# EAGLE board stm32f3driver3 (EAGLE 6.6.0)
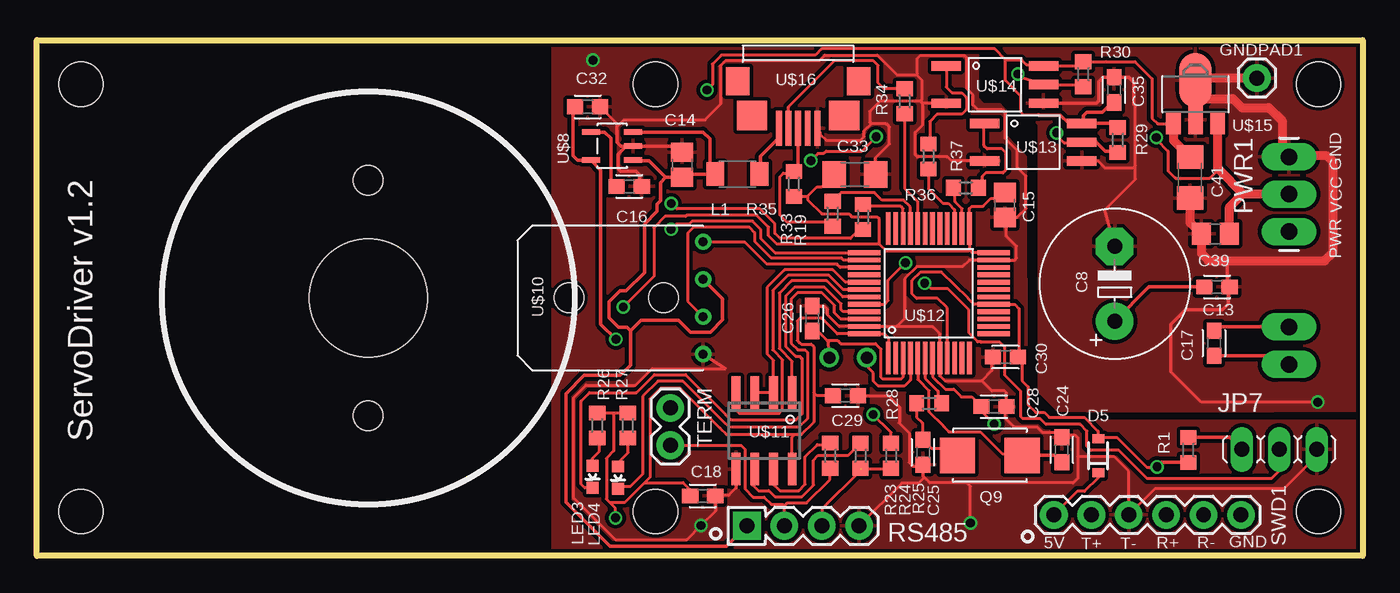
[diagram p0: board, top side]
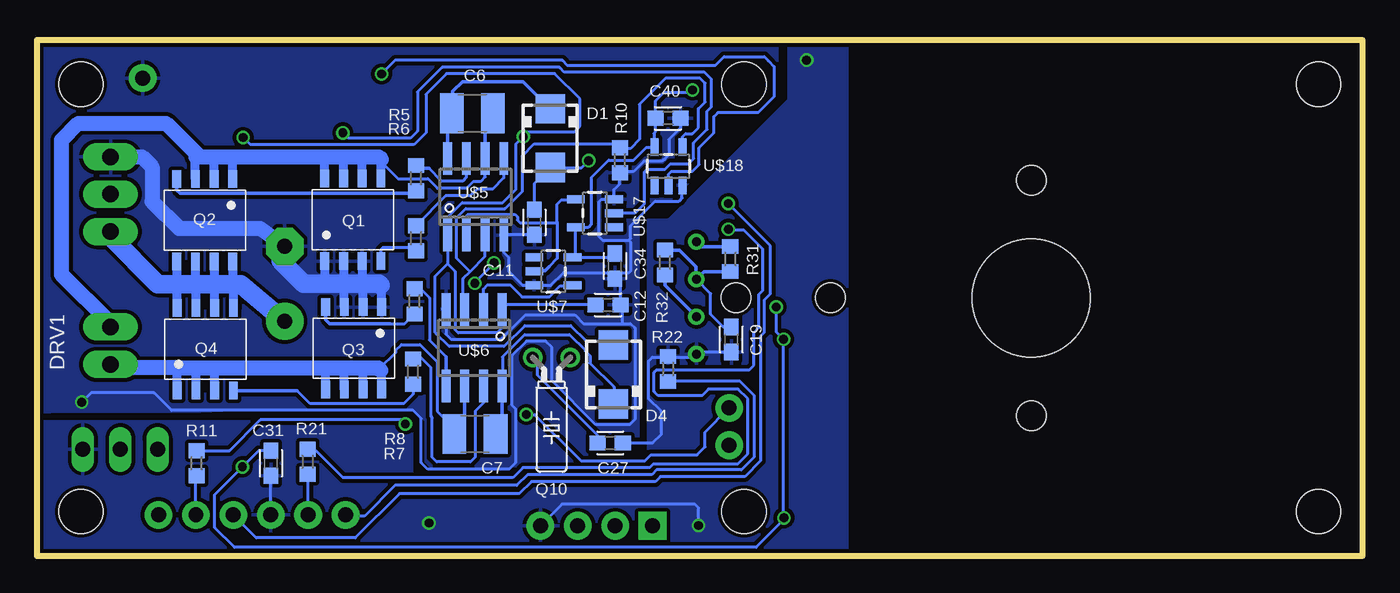
[diagram p1: board, bottom side, seen from below]

Size 90 x 35 mm. Coordinates in mm from the lower left corner, seen from the top.
Outline: 0,0 0,35 90,35 90,0 0,0
Copper layers (1*16): Top 0.035mm / dielectric 1.5mm / Bottom 0.035mm
Design rules "Elecrow_2-layer_eagle_rule": minimum track width 6mil, minimum drill 12mil, track to track 6mil, track to pad 6mil, pad to pad 6mil, via to via 6mil, smd to smd 0mil, copper to edge 10mil, drill to drill 10mil, minimum pad ring 10mil, minimum via ring 6mil, stop-mask expansion 2mil, vias tented up to drill 100mil, thermal gap 10mil
Holes 3 mm at 3,3 87,3 87,32 3,32 42,32 42,3
Holes 8 mm at 22.5,17.5
Holes 2 mm at 22.5,25.5 22.5,9.5

## Footprints (pad centres in the part's own frame; a part is rotated, then mirrored left to right if it is on the bottom)
C3225 = smd 1.6 x 2.7: 1 -1.4,0; 2 1.4,0
E5-10,5 = drill 1.016 pad 2.54: + -2.54,0 | drill 1.016 pad 2.54 octagon: - 2.54,0
C0603 = smd 1.1 x 1: 1 -0.85,0; 2 0.85,0
C2012 = smd 1.3 x 1.5: 1 -0.85,0; 2 0.85,0
C1608 = smd 1.1 x 1: 1 -0.85,0; 2 0.85,0
C3216 = smd 1.6 x 1.8: 1 -1.4,0; 2 1.4,0
C0805 = smd 1.3 x 1.5: 1 -0.95,0; 2 0.95,0
SMA = smd 2 x 2: A 2,0; C -2,0
SOD-323 = smd 0.63 x 0.83: 1 -1.15,0; 2 1.15,0
1X01 = drill 1.016 pad 1.88: 1 0,0
1X02_LONGPADS = drill 1.118 pad 1.88 long: 1 0,0; 2 2.54,0
1X03 = drill 1.016 long: 1 -2.54,0; 2 0,0; 3 2.54,0
L3216C = smd 1.2 x 1.6: 1 -1.5,0; 2 1.5,0
LED-0603 = smd 0.8 x 0.8: A 0,-0.75; C 0,0.75
1X03_LONGPADS = drill 1.118 pad 1.88 long: 1 0,0; 2 2.54,0; 3 5.08,0
1206-8CHIP-FET = smd 0.6 x 1.2: 1 -1.905,-2.8; 2 -0.635,-2.8; 3 0.635,-2.8; 4 1.905,-2.8; 5 1.905,2.8; 6 0.635,2.8; 7 -0.635,2.8; 8 -1.905,2.8
SMD5032 = smd 2.4 x 2.4: P1 2.2,0; P2 -2.2,0
TC26H = drill 0.813: 1 -1.27,0; 2 1.27,0
R0603 = smd 1 x 1.1: 1 -0.85,0; 2 0.85,0
1X04 = drill 1.016 pad 1.88 square: 1 0,0 | drill 1.016 pad 1.88: 2 2.54,0; 3 5.08,0; 4 7.62,0
1X06 = drill 1.016 pad 1.88: 1 0,0; 2 2.54,0; 3 5.08,0; 4 7.62,0; 5 10.16,0; 6 12.7,0
1X02 = drill 1.016 pad 1.88: 1 0,0; 2 2.54,0
SO8 = smd 0.6 x 2.2: 1 -1.905,-2.6; 2 -0.635,-2.6; 3 0.635,-2.6; 4 1.905,-2.6; 5 1.905,2.6; 6 0.635,2.6; 7 -0.635,2.6; 8 -1.905,2.6
SOT23-5 = smd 0.55 x 1.2: 1 -0.95,-1.3; 2 0,-1.3; 3 0.95,-1.3; 4 0.95,1.3; 5 -0.95,1.3
TAR5SB33 = smd 1.2 x 0.4: P$_1 -1.425,0.95; P$_2 -1.425,0; P$_3 -1.425,-0.95; P$_4 1.425,-0.95; P$_5 1.425,0.95
HEDS9701 = drill 0.6: P$1 9.1,3.81; P$2 9.1,1.27; P$3 9.1,-1.27; P$4 9.1,-3.81 | hole 2: 0,0; 6.4,0
TQFP48 = smd 0.32 x 2.2: P$1 -2.75,-4.4; P$2 -2.25,-4.4; P$3 -1.75,-4.4; P$4 -1.25,-4.4; P$5 -0.75,-4.4; P$6 -0.25,-4.4; P$7 0.25,-4.4; P$8 0.75,-4.4; P$9 1.25,-4.4; P$10 1.75,-4.4; P$11 2.25,-4.4; P$12 2.75,-4.4; P$25 2.75,4.4; P$26 2.25,4.4; P$27 1.75,4.4; P$28 1.25,4.4; P$29 0.75,4.4; P$30 0.25,4.4; P$31 -0.25,4.4; P$32 -0.75,4.4; P$33 -1.25,4.4; P$34 -1.75,4.4; P$35 -2.25,4.4; P$36 -2.75,4.4 | smd 2.2 x 0.32: P$13 4.4,-2.75; P$14 4.4,-2.25; P$15 4.4,-1.75; P$16 4.4,-1.25; P$17 4.4,-0.75; P$18 4.4,-0.25; P$19 4.4,0.25; P$20 4.4,0.75; P$21 4.4,1.25; P$22 4.4,1.75; P$23 4.4,2.25; P$24 4.4,2.75; P$37 -4.4,2.75; P$38 -4.4,2.25; P$39 -4.4,1.75; P$40 -4.4,1.25; P$41 -4.4,0.75; P$42 -4.4,0.25; P$43 -4.4,-0.25; P$44 -4.4,-0.75; P$45 -4.4,-1.25; P$46 -4.4,-1.75; P$47 -4.4,-2.25; P$48 -4.4,-2.75
SO5 = smd 0.635 x 2: P$1 -1.27,-3.3; P$2 1.27,-3.3; P$3 1.27,3.3; P$4 0,3.3; P$5 -1.27,3.3
SOT89 = smd 1 x 1.5: 1 -1.499,-1.981; 3 1.499,-1.981 | smd 1 x 2: 2 0,-1.727 | smd 2.2 x 3.7: 2@1 0,0.94
USB_MICROB = smd 0.4 x 2.4: P$1 1.3,3.2; P$2 0.65,3.2; P$3 0,3.2; P$4 -0.65,3.2; P$5 -1.3,3.2 | smd 2.05 x 2: P$6 -3.125,2.35; P$7 3.125,2.35 | smd 1.6 x 1.9: P$8 -4.1,0; P$9 4.1,0

## Placement (x,y rotation side)
C6  22uF  [C3225]  60.44,30.04 0 bottom
C7  22uF  [C3225]  60.26,8.27 180 bottom
C8  470uF  [E5-10,5]  73.17,18.46 90 top
C11  0.1uF  [C0603]  56.23,22.63 270 bottom
C12  0.1uF  [C0603]  51.22,17.03 0 bottom
C13  0.1uF  [C0603]  80.11,18.25 0 top
C14  1uF  [C2012]  43.8,26.53 90 top
C15  4.7uF  [C2012]  65.71,23.81 270 top
C16  0.01uF  [C0603]  40.21,25.07 0 top
C17  0.1uF  [C0603]  79.91,14.43 270 top
C18  0.1uF  [C1608]  45.2,4.07 0 top
C19  0.1uF  [C0603]  42.86,14.68 90 bottom
C24  7pF  [C0603]  69.58,7.2 90 top
C25  7pF  [C0603]  60.15,7.03 270 top
C26  6.8pF  [C0603]  52.63,16.11 90 top
C27  6.8pF  [C0603]  51.08,7.66 0 bottom
C28  0.1uF  [C0603]  64.97,10.13 0 top
C29  0.01uF  [C0603]  54.89,10.87 0 top
C30  0.01uF  [C0603]  65.75,13.49 180 top
C31  0.01uF  [C0603]  74.11,6.28 270 bottom
C32  0.01uF  [C0603]  37.39,30.47 0 top
C33  10uF  [C3216]  55.53,25.88 0 top
C34  0.1uF  [C0603]  50.76,19.66 270 bottom
C35  0.1uF  [C0603]  73.12,31.62 90 top
C39  0.33uF  [C0805]  80,21.85 180 top
C40  0.1uF  [C0603]  47.15,29.69 0 bottom
C41  10uF  [C3216]  78.27,25.67 270 top
D1  SX34F  [SMA]  55.16,28.34 270 bottom
D4  SX34F  [SMA]  50.86,12.3 90 bottom
D5  1SS352  [SOD-323]  72.05,6.79 90 top
GNDPAD1  M01PTH  [1X01]  82.82,32.42 0 top
JP1  [1X02_LONGPADS]  85,13 90 top
JP7  [1X03]  84.34,7.23 180 top
L1  [L3216C]  47.56,25.91 180 top
LED3  [LED-0603]  37.73,5.37 180 top
LED4  [LED-0603]  39.46,5.31 180 top
PWR1  [1X03_LONGPADS]  85,22 90 top
Q1  FDS5680  [1206-8CHIP-FET]  68.55,22.8 0 bottom
Q2  FDS5680  [1206-8CHIP-FET]  78.6,22.77 180 bottom
Q3  FDS5680  [1206-8CHIP-FET]  68.49,14.08 180 bottom
Q4  FDS5680  [1206-8CHIP-FET]  78.56,14.02 0 bottom
Q9  8MHz  [SMD5032]  64.69,6.82 180 top
Q10  32.768kHz  [TC26H]  55.07,13.45 180 bottom
R1  10k  [R0603]  78.16,7.19 270 top
R5  22  [R0603]  64.26,25.63 90 bottom
R6  22  [R0603]  64.26,21.55 90 bottom
R7  22  [R0603]  64.46,12.5 90 bottom
R8  22  [R0603]  64.36,17.27 90 bottom
R10  10k  [R0603]  50.42,26.85 270 bottom
R11  22  [R0603]  79.15,6.29 90 bottom
R19  22  [R0603]  56.08,22.99 90 top
R21  22  [R0603]  71.61,6.38 90 bottom
R22  10k  [R0603]  47.15,12.68 270 bottom
R23  33  [R0603]  53.86,6.8 270 top
R24  33  [R0603]  55.91,6.79 270 top
R25  100  [R0603]  57.98,6.79 90 top
R26  330  [R0603]  38.04,8.85 90 top
R27  330  [R0603]  40.12,8.85 90 top
R28  220  [R0603]  60.57,10.35 180 top
R29  330  [R0603]  73.37,28.22 90 top
R30  330  [R0603]  71.03,32.68 90 top
R31  330  [R0603]  42.93,20.14 270 bottom
R32  330  [R0603]  47.36,19.9 90 bottom
R33  27  [R0603]  54.02,23.22 270 top
R34  27  [R0603]  58.91,30.85 90 top
R35  1.5k  [R0603]  51.39,25.24 270 top
R36  470  [R0603]  63.07,24.97 180 top
R37  470  [R0603]  60.53,27.1 270 top
RS485  [1X04]  48.2,2.04 0 top
SWD1  [1X06]  69.04,2.78 0 top
TERM  [1X02]  43,10.04 270 top
U$5  IR2302S  [SO8]  60.21,24.36 0 bottom
U$6  IR2302S  [SO8]  60.32,14.12 180 bottom
U$7  4S69F  [SOT23-5]  54.94,19.3 270 bottom
U$8  TAR5SB33  [TAR5SB33]  39.05,27.81 180 top
U$10  HEDS9701-C54  [HEDS9701]  36.13,17.5 0 top
U$11  SN65HVD3085  [SO8]  49.37,8.49 180 top
U$12  STM32F373C  [TQFP48]  60.55,17.82 0 top
U$13  ACPL-M60L  [SO5]  67.63,28.07 270 top
U$14  ACPL-M60L  [SO5]  65.04,31.98 270 top
U$15  NJM78L05UA  [SOT89]  78.65,31.33 0 top
U$16  USB-MICROB  [USB_MICROB]  51.68,32.22 180 top
U$17  4S69F  [SOT23-5]  52.12,23.26 90 bottom
U$18  4S69F  [SOT23-5]  47.13,26.44 0 bottom

## Library data of the parts
C6-C8 C11-C19 C24-C35 C39-C41 L1 R1 R5-R8 R10 R11 R19 R21-R37 = rcl
D1 D4 = diode
D5 GNDPAD1 JP1 LED3 LED4 PWR1 RS485 SWD1 TERM = SparkFun
JP7 Q1-Q4 Q9 U$5-U$8 U$10-U$18 = mizdevice
Q10 = crystal; OC_FARNELL: unknown; OC_NEWARK: unknown

## Nets
+3V3: C15.1 C18.1 C29.1 C30.1 C31.1 C32.1 C33.1 D5.2 R1.2 R26.2 R27.2 R35.2 U$8.P$_5 U$11.8 U$12.P$1 U$12.P$9 U$12.P$17 U$12.P$24 U$12.P$25 U$12.P$48
+5V: C14.1 C19.2 L1.2 R31.2 R32.2 RS485.1 U$8.P$_1 U$8.P$_3 U$10.P$2
BOOT0: JP7.2 U$12.P$44
DGND: C14.2 C15.2 C16.2 C18.2 C19.1 C24.2 C25.2 C26.2 C27.2 C28.2 C29.2 C30.2 C31.2 C32.2 C33.2 JP7.1 R22.1 RS485.4 SWD1.3 U$8.P$_2 U$10.P$4 U$11.5 U$12.P$8 U$12.P$23 U$12.P$47 U$13.P$2 U$14.P$2 U$16.P$5
DRV_IN: U$5.2 U$7.2 U$17.4
GND: C8.- C11.2 C12.2 C13.2 C34.2 C35.2 C39.2 C40.2 C41.2 GNDPAD1.1 PWR1.3 Q1.1 Q1.2 Q1.3 Q3.1 Q3.2 Q3.3 R10.2 U$5.4 U$6.4 U$7.3 U$13.P$3 U$14.P$3 U$15.2 U$15.2@1 U$17.3 U$18.3
JRST: C28.1 R11.2 U$12.P$7
JTCK: R21.2 U$12.P$37
JTMS: R19.2 U$12.P$34
LED0: LED3.C U$12.P$45
LED1: LED4.C U$12.P$46
N$1: C7.1 D4.C U$6.8
N$3: C7.2 C17.2 JP1.1 Q3.5 Q3.6 Q3.7 Q3.8 Q4.1 Q4.2 Q4.3 U$6.6
N$5: C6.2 C17.1 JP1.2 Q1.5 Q1.6 Q1.7 Q1.8 Q2.1 Q2.2 Q2.3 U$5.6
N$6: C6.1 D1.C U$5.8
N$7: R5.2 U$5.7
N$10: R6.2 U$5.5
N$11: R7.2 U$6.7
N$13: R8.2 U$6.5
N$14: Q2.4 R5.1
N$15: Q4.4 R7.1
N$16: Q3.4 R8.1
N$17: U$6.2 U$7.4
N$18: Q1.4 R6.1
N$19: D5.1 R22.2 SWD1.1
N$20: R21.1 SWD1.2
N$22: R19.1 SWD1.4
N$28: R11.1 SWD1.5
N$30: C16.1 U$8.P$_4
N$34: LED3.A R26.1
N$37: LED4.A R27.1
N$38: R23.1 U$11.7
N$42: R24.1 U$11.6
N$45: R24.2 R25.1 RS485.3
N$48: R23.2 RS485.2 TERM.2
N$49: R25.2 TERM.1
N$50: R28.1 U$12.P$6
N$51: C25.1 Q9.P1 R28.2
N$52: C24.1 Q9.P2 U$12.P$5
N$53: C27.1 Q10.2 U$12.P$4
N$54: C26.1 Q10.1 U$12.P$3
N$55: R34.2 U$16.P$2
N$56: R33.2 R35.1 U$16.P$3
N$57: L1.1 U$16.P$1
N$58: R29.1 U$13.P$4 U$17.2
N$59: R30.1 U$14.P$4 U$18.2
N$60: R37.1 U$14.P$1
N$61: R36.1 U$13.P$1
N$66: JP7.3 R1.1
SD1: R37.2 U$12.P$27
SD_IN: R10.1 U$5.3 U$6.3 U$18.4
TIM2_CH1: R32.1 U$10.P$3 U$12.P$38
TIM2_CH2: R31.1 U$10.P$1 U$12.P$39
TIM12_CH1: R36.2 U$12.P$26
U1ENA: U$11.2 U$11.3 U$12.P$41
U1RX: U$11.1 U$12.P$43
U1TX: U$11.4 U$12.P$42
USBDM: R34.1 U$12.P$32
USBDP: R33.1 U$12.P$33
VCC: C11.1 C12.1 C39.1 D1.A D4.A PWR1.2 U$5.1 U$6.1 U$15.3
VCC/2: C34.1 C35.1 C40.1 C41.1 R29.2 R30.2 U$7.5 U$13.P$5 U$14.P$5 U$15.1 U$17.5 U$18.5
VDD: C8.+ C13.1 PWR1.1 Q2.5 Q2.6 Q2.7 Q2.8 Q4.5 Q4.6 Q4.7 Q4.8

## Tracks (layer width: path | path; a pad name or v marks a point on that pad's centre or on a via)
+3V3  (via drill 0.6)
  Top 0.2: 52.74,11.08 52.74,14.18 52.56,14.36 51.9,14.36 51.82,14.44 51.81,14.44 51.63,14.62 51.63,15.95 51.8,16.12 53.29,16.12 54.34,15.07 U$12.P$48 57.53,15.07 57.8,14.8 U$12.P$1 | 52.74,11.08 52.74,9.07 51.91,8.24 51.46,8.24 | U$12.P$9 61.8,16.82 61.14,17.48 59.71,17.48 59.41,17.78 59.41,18.69 59.98,19.26 61.41,19.26 63.22,17.47 63.22,17.46 63.61,17.07 U$12.P$17 66.38,17.07 66.68,16.77 66.68,13.57 C30.1 66.88,13.21 66.88,11.89 67.28,11.49 67.28,10.27 67.81,9.74 68.38,9.74 68.72,9.4 71.11,9.4 72.04,8.47 D5.2 | 63.3,20.75 63.46,20.59 64.93,20.59 U$12.P$24 | C15.1 65.31,24.26 64.77,24.26 64.23,23.72 63.46,23.72 63.3,23.56 U$12.P$25 63.3,20.75 | C29.1 52.95,10.87 52.74,11.08 | D5.2 | 52.32,24.39 R35.2 51.77,24.39 | 52.32,24.39 52.97,25.04 53.29,25.04 C33.1 | 57.19,21.16 57.66,20.69 63.24,20.69 63.3,20.75 | D5.2 72.15,8.04 73.33,8.04 75.36,6.01 76.01,6.01 v76.04,6.04 | R27.2 40.09,9.67 39.16,9.67 | R27.2 39.78,9.7 | 39.16,9.67 39.16,7.12 38.66,6.62 38.66,3.85 38.87,3.64 | 38.87,3.64 39.93,3.64 41.26,4.97 | 41.26,4.97 43.88,4.97 44.35,4.5 C18.1 | 39.16,9.67 38.29,9.67 R26.2 | U$8.P$_5 37.62,26.84 | v39.28,2.58 39.28,3.23 38.87,3.64 | 57.19,21.16 57.19,22.86 57.06,22.99 55.38,22.99 55.16,23.21 53.28,23.21 52.32,24.17 52.32,24.39 | 40.18,9.76 R27.2 | 41.26,4.97 41.62,5.33 41.62,10.65 42.35,11.38 43.66,11.38 46.37,8.67 46.37,8.66 46.39,8.66 46.81,8.24 51.46,8.24 | U$11.8 51.27,8.05 51.46,8.24 | 57.19,21.16 50.23,21.16 49.68,21.71 49.68,22.3 48.86,23.12 44.13,23.12 44.05,23.04 42.64,23.04 41.88,22.28 41.88,18.96 v39.81,16.89
  Top 0.254: U$8.P$_5 36.71,26.86 36.41,27.16 36.41,30.34 C32.1 | 37.62,26.84 38.28,26.18 38.28,15.73 v39.31,14.7 | R1.2 76.34,6.34 v76.04,6.04
  Bottom 0.2: C31.1 74.95,7.13 v76.04,6.04 77.92,4.16 77.92,1.92 76.58,0.58 41.18,0.58 39.28,2.48 v39.28,2.58 39.31,2.61 v39.31,14.7 39.81,15.2 v39.81,16.89
+5V
  Top 0.2: 37.16,12.24 37.15,12.25
  Top 0.254: 42.69,25.68 C14.1 44.03,25.91 L1.2 45.69,26.28 45.69,28.29 45.22,28.76 U$8.P$_3 | 42.69,25.68 41.57,26.8 40.53,26.8 U$8.P$_1 | 42.69,25.68 42.34,25.33 42.34,24.1 42.11,23.87 42.11,23.37 41.24,22.5 41.24,19.22 40,17.98 39.6,17.98 38.85,17.23 38.85,16.15 39.48,15.52 40.06,15.52 40.3,15.28 | RS485.1 46.8,0.64 38.92,0.64 35.91,3.65 35.91,11.01 37.15,12.25 | 37.16,12.24 39.6,12.24 40.3,12.94 40.3,15.28 | 40.3,15.28 41,15.98 43.56,15.98 44.36,15.18 45.72,15.18 46.55,16.01 46.55,17.45 U$10.P$2
  Bottom 0.2: C19.2 43.41,15.53 44.26,16.38 44.26,17.8 U$10.P$2
  Bottom 0.254: R32.2 46.37,20.75 45.24,19.62 U$10.P$2 44.71,19.29 R31.2
BOOT0  (via drill 0.6)
  Top 0.2: JP7.2 84.34,5.77 83.81,5.24 75.38,5.24 73.46,7.16 71.56,7.16 71.29,7.43 71.29,8.47 70.83,8.93 68.5,8.93 68.12,9.31 66.92,9.31 66.79,9.44 66.79,11.18 65.71,12.26 65.71,14.16 65.38,14.49 64.11,14.49 64.08,14.52 63.88,14.52 63.26,15.14 63.26,16.7 61.83,18.13 60.7,18.13 v60.27,18.5 | U$12.P$44 57.52,17.07 57.79,17.34 57.79,18.7 v58.97,19.88
  Bottom 0.2: 59.1,19.71 v58.97,19.88 v60.27,18.5
DGND  (via drill 0.6)
  Top 0.2: 60.14,30.72 60.14,29.27 59.63,28.76 59.63,27.21 59.76,27.08 61.81,27.08 62.09,26.8 U$13.P$2 64.57,26.8 | 60.14,30.72 60.14,30.76 60.04,30.76 59.96,30.84 | 60.18,5.39 60.18,6.15 C25.2 60.05,6.08 59.48,6.08 59.22,6.34 59.22,8.32 58.54,9 58.54,10.13 57.8,10.87 C29.2 | C26.2 52.69,16.9 53.49,16.9 53.67,16.72 53.67,16.35 54.45,15.57 U$12.P$47 58.4,15.57 | 39.4,28.85 39.4,29.12 | 39.4,29.12 39.87,29.59 45.36,29.59 46.4,30.63 46.4,33.25 46.75,33.6 53.12,33.6 53.49,33.97 57.06,33.97 58.37,32.66 59.71,32.66 | 39.4,29.12 39.4,29.31 C32.2 | 52.98,28.74 53.16,28.74 53.16,28.62 53.59,28.19 55.9,28.19 56.15,28.44 56.15,28.83 56.64,29.32 | U$11.5 47.47,4.62 46.96,4.11 46.09,4.11 C18.2 46.06,3.04 v45.08,2.06 44.12,1.1 39.27,1.1 36.45,3.92 36.42,3.92 36.42,10.72 37.28,11.58 40.64,11.58 41.76,12.7 46.74,12.7 U$10.P$4 | 56.64,29.32 57.66,29.32 57.88,29.1 57.88,27.95 56.93,27 C33.2 | U$14.P$2 60.15,30.71 60.14,30.72 | 59.71,32.66 60.08,32.29 60.08,30.96 59.96,30.84 | 59.71,32.66 59.75,32.7 59.75,33.74 59.96,33.95 62.97,33.95 63.13,33.79 63.13,31.7 63.54,31.29 63.54,30.61 63.89,30.26 65.54,30.26 65.76,30.04 65.76,28.29 66.57,27.48 66.57,26.34 67.14,25.77 67.14,23.56 66.54,22.96 C15.2 65.82,22.85 65.82,21.7 66.51,21.01 66.51,20.22 66.36,20.07 U$12.P$23 63.29,20.07 62.84,19.62 59.74,19.62 58.91,18.79 58.91,16.08 58.4,15.57 | 59.96,30.84 57.22,30.84 56.54,30.16 56.54,29.42 56.64,29.32 | 60.18,5.39 60.18,5.26 59.86,4.94 58.72,4.94 RS485.4 | 63.15,4.95 70.36,4.95 70.66,5.25 70.66,6.75 | 63.15,4.95 60.62,4.95 60.18,5.39 | 64.14,11.89 61.63,11.89 61.3,12.22 U$12.P$8 61.3,15.08 60.81,15.57 58.4,15.57
  Top 0.2: 64.14,11.89 64.84,12.59 64.84,13.43 C30.2 | 64.14,11.89 64.83,11.2 65.68,11.2 65.82,11.06 C28.2 65.76,10.07 65.76,9.33 66.23,8.86 66.24,8.86 66.34,8.76 67.89,8.76 68.27,8.38 69.25,8.38 C24.2 | 86.88,6.8 86.88,6.79 84.63,4.54 75.88,4.54 SWD1.3 74.12,5.74 73.13,6.73 70.68,6.73 70.66,6.75 | v63.38,2.23 63.38,4.72 63.15,4.95 | 69.74,8.21 70.45,8.21 70.66,8 70.66,6.75
  Top 0.254: 69.74,8.21 C24.2 | U$16.P$5 52.98,28.74 | C14.2 43.37,27.81 U$8.P$_2 40.01,27.8 | 39.4,28.85 39.4,28.07 39.67,27.8 40.01,27.8 | 40.01,27.8 39.45,27.24 39.45,26.27 39.63,26.09 40.67,26.09 40.91,25.85 40.91,25.22 C16.2 | JP7.1 86.88,6.8
  Bottom 0.2: SWD1.3 C31.2 | v45.08,2.06 45.08,3.26 45.33,3.51 54.35,3.51 RS485.4 | C27.2 48.19,7.66 47.61,8.24 47.61,9.8 48.48,10.67 48.48,13.21 48.21,13.48 47.2,13.48 | 47.2,13.48 R22.1 | 47.2,13.48 45.44,13.48 U$10.P$4 45.09,13.83 C19.1
  other vias: 37.75,33.64
  pour Top (isolate 0.254): 35.33,34.67 35,34.62 35,0.37 89.67,0.37 89.72,9.13 82.29,9.12 68.69,9.12 67.16,10.62 67.13,27.08 65.79,28.52 65.77,30.22 65.39,30.62 64.27,30.63 63.88,31.04 63.88,34.62 63.82,34.68 35.93,34.65 35.69,34.67
  pour Bottom (isolate 0.254): 89.72,0.32 89.73,0.4 89.64,9.14 77.33,9.12 74.76,9.18 65.21,9.2 64.56,8.55 64.56,5.79 63.98,5.21 48.48,5.21 48.48,22.81 47.13,22.81 38.95,30.99 38.95,34.69 35,34.69 35,0.31 89.4,0.31 89.4,0.34
DRV_IN
  Bottom 0.2: 54.67,22.65 54.67,20.18 55.22,19.63 | 54.67,22.65 54.72,22.6 57.19,22.6 57.38,22.79 57.38,23 57.55,23.17 60.73,23.17 60.84,23.05 U$5.2 | 54.67,22.65 54.67,23.87 54.39,24.15 53.48,24.15 U$17.4
  Bottom 0.254: 55.22,19.63 55.49,19.36 56.18,19.36 U$7.2
GND  (via drill 0.6)
  Top 0.2: C8.- 72.5,23.49 74.57,25.56 74.57,26.49 | 74.57,26.49 74.57,30.54 74.47,30.64 | U$13.P$3 72.04,26.8 72.49,26.35 74.43,26.35 74.57,26.49 | v86.95,10.43 79.06,10.43 76.99,12.5
  Top 0.254: U$15.2 78.65,30.99 U$15.2@1 | 76.99,12.5 76.99,15.72 77.98,16.71 80.47,16.71 80.87,17.11 80.87,18.31 80.91,18.35 80.89,18.35 80.86,18.32 | C13.2 80.82,18.11 80.82,19.86 80.98,20.02 | 74.47,30.64 74.47,32.14 74.14,32.47 C35.2 73.1,32.49 72.41,32.49 72.1,32.18 72.1,30.88 71.93,30.71 U$14.P$3
  Top 0.61: 77.89,24.27 C41.2 78.27,22.63 C39.2 79.05,20.52 79.55,20.02 80.98,20.02 87.4,20.02 87.99,20.61 87.99,26.73 87.58,27.14 85.06,27.14 PWR1.3 84.53,27.55 84.53,29.51 83.62,30.42 81.78,30.42 81.18,31.02 78.62,31.02 78.65,30.99 | GNDPAD1.1 78.8,32.42 U$15.2@1
  Bottom 0.2: C11.2 58.28,21.78 U$5.4 58.3,20.59 57.97,20.25 57.97,19.31 57.02,18.36 U$7.3 | C40.2 46.3,29.05 47.09,28.26 47.09,27.21 47.39,26.91 47.41,26.91 47.53,26.79 48.79,26.79 49.51,26.07 50.35,26.07 R10.2 50.44,25.98 50.44,25.23 50.82,24.85 U$17.3 50.84,24.19 51.67,24.19 51.83,24.03 51.83,21.65 51.6,21.42 49.82,21.42 | v86.95,10.43 86.32,11.06 82.04,11.06 80.85,9.87 64.45,9.87 63.91,9.33 63.91,6.33 63.47,5.89 57.94,5.89 57.51,6.32 57.51,9.99 57.73,10.21 57.73,13.61 56.77,14.57 55.46,14.57 55.04,14.15 55.04,11.88 52.07,8.91 49.76,8.91 49.41,9.26 49.41,15.47 49.7,15.76 50.18,15.76 | U$7.3 | U$7.3 55.12,18.36 54.26,19.22 51.17,19.22 | 51.17,19.22 C34.2 50.37,18.42 C12.2 50.55,16.85 50.39,16.85 50.27,16.73 50.27,15.85 50.18,15.76 | U$6.4 62.23,15.04 61.85,14.67 58.52,14.67 56.84,16.35 53.48,16.35 52.89,15.76 50.18,15.76 | U$18.3 46.19,24.29 46.41,24.07 48.02,24.07 49.7,22.39 49.69,22.38 49.69,21.55 49.82,21.42 | 51.17,19.22 49.8,19.22 49.68,19.34 49.68,21.28 49.82,21.42
  Bottom 0.254: 56.26,18.33 U$7.3 | U$7.3 | 56.15,18.44 U$7.3
  Bottom 0.61: Q3.1 66.58,18.29 66.66,18.36 | Q3.2 67.86,18.39 67.76,18.48 67.92,18.64 Q1.3 | Q3.3 69.12,18.43 69.08,18.48 69.19,18.59 Q1.2 | Q1.1 70.45,18.66 70.28,18.48
  Bottom 1.016: C8.- 74.85,22.22 80.35,22.22 82.17,24.04 82.17,26.4 82.85,27.08 PWR1.3
  Bottom 1.27: C8.- 73.45,20.04 71.89,18.48 70.28,18.48 69.08,18.48 67.76,18.48 66.78,18.48 66.66,18.36
  pour Top (isolate 0.254): 65.24,34.7 65.24,32.35 66.42,31.17 66.42,30.08 66.9,29.6 67.67,29.6 68.03,29.24 68.03,11.13 69.31,9.85 75.26,9.85 78.24,9.82 89.72,9.87 89.59,34.69 65.66,34.69
  pour Bottom (isolate 0.254): 89.69,34.71 89.7,34.71 89.7,10.02 89.65,9.77 89.04,9.79 78.9,9.81 75.11,9.98 64.4,9.98 63.6,9.18 63.6,6.4 63.33,6.13 49.14,6.13 49.14,24.05 47.02,24.05 39.74,31.33 39.74,34.7 89.41,34.7 89.41,34.73
JRST  (via drill 0.6)
  Top 0.2: U$12.P$7 60.8,12.17 61.66,11.31 62.24,11.31 62.76,10.79 63.46,10.79 C28.1 64.12,9.81 v64.98,8.95
  Bottom 0.2: R11.2 76.91,7.14 74.83,9.22 65.18,9.22 64.98,9.02 v64.98,8.95
JTCK  (via drill 0.6)
  Top 0.2: U$12.P$37 50.11,20.57 49.13,21.55 49.13,22.16 48.58,22.71 44.48,22.71 44.27,22.5 43.4,22.5 v43.06,22.16
  Bottom 0.2: 71.5,7.12 R21.2 71.47,7.09 70.99,7.09 69.21,5.31 57.68,5.31 57,5.99 48.4,5.99 48.16,6.23 42.44,6.23 41.73,6.94 41.73,10.66 42.39,11.32 44.41,11.32 44.86,10.87 47.82,10.87 48.1,11.15 48.1,12.45 47.94,12.61 41.67,12.61 41.33,12.95 41.33,15.14 40.97,15.5 40.97,17.76 40.72,18.01 40.72,20.81 42.01,22.1 43,22.1 v43.06,22.16
JTMS
  Top 0.2: U$12.P$34 58.8,23.57 58.65,23.72 56.1,23.72 R19.2
LED0
  Top 0.2: U$12.P$45 54.73,16.57 54.59,16.71 54.59,17.11 53.46,18.24 51.43,18.24 50.82,17.63 50.82,14.22 51.44,13.6 51.45,13.6 51.52,13.53 51.81,13.53 51.95,13.39 51.95,9.63 51.54,9.22 47.11,9.22 46.72,9.61 46.72,9.63 44.05,12.3 41.92,12.3 40.7,11.08 37.51,11.08 36.93,10.5 36.93,4.87 37.18,4.62 LED3.C
LED1
  Top 0.2: U$12.P$46 54.58,16.07 54.16,16.49 54.16,16.99 53.3,17.85 51.63,17.85 51.2,17.42 51.2,14.43 51.66,13.97 52.15,13.97 52.32,13.8 52.32,9.32 51.75,8.75 46.97,8.75 46.61,9.11 46.6,9.11 43.85,11.86 42.15,11.86 41.12,10.83 41.12,5.54 40.27,4.69 39.59,4.69 LED4.C 39.75,4.62
N$1
  Bottom 0.2: U$6.8 58.39,11.54 58.39,13.51 56.88,15.02 53.84,15.02 52.76,13.94 52.76,13.9 52.45,13.59 52.45,13.08 50.83,11.46 50.83,10.33 D4.C
  Bottom 0.254: U$6.8 58.41,8.71 C7.1 58.64,8.49
N$3
  Top 0.254: C17.2 84.42,13.58 JP1.1
  Bottom 0.2: C7.2 62.04,8.65 62.04,9.04 62.82,9.82 62.82,13.17 63.99,14.34 65.25,14.34 65.65,13.94 65.65,13.79 66.75,12.69
  Bottom 0.254: U$6.6 60.95,8.97 C7.2
  Bottom 0.61: Q3.8 66.58,12.52 66.66,12.59 | Q3.7 67.86,12.61 68.01,12.76 | Q3.6 69.12,12.71 69.08,12.76 | Q3.5 70.39,12.72 70.36,12.76 | Q4.3 77.92,12.62 78.07,12.76 | Q4.1 80.47,12.65 80.36,12.76 | Q4.2 79.19,12.7 79.26,12.76
  Bottom 1.016: 66.66,12.59 66.75,12.69 66.83,12.76 68.01,12.76 69.08,12.76 70.36,12.76 78.07,12.76 79.26,12.76 80.36,12.76 84.76,12.76 JP1.1
N$5
  Top 0.254: JP1.2 80.17,15.54 C17.1
  Bottom 0.2: 66.61,26.9 66.61,26.71 65.49,25.59 63.45,25.59 62.8,24.94 60.82,24.94 60.37,25.39 59.89,25.39 59.57,25.71 U$5.6
  Bottom 0.254: U$5.6 59.58,29.5 C6.2
  Bottom 0.61: Q1.5 66.64,26.93 66.78,27.07 | Q1.6 67.92,27.05 67.89,27.07 | Q1.7 69.19,27 69.26,27.07 | Q1.8 70.45,27.05 70.48,27.07 | Q2.1 76.69,27.02 76.75,27.07 | Q2.2 77.97,27.05 77.98,27.07 | Q2.3 79.23,27.04 79.2,27.07
  Bottom 1.016: JP1.2 85,15.77 88.32,19.09 88.32,28.21 87.18,29.35 81.23,29.35 78.95,27.07 | 79.2,27.07 78.95,27.07 | 78.95,27.07 77.98,27.07 76.75,27.07 70.48,27.07 69.26,27.07 67.89,27.07 66.78,27.07 66.61,26.9
N$6
  Bottom 0.254: U$5.8 62.12,29.77 C6.1 61.78,30.1 61.78,31.51 61.11,32.18 57.01,32.18 55.18,30.35 D1.C
N$7
  Bottom 0.2: U$5.7 60.84,25.66 61.08,25.43 62.52,25.43 63.38,26.29
  Bottom 0.254: 63.38,26.29 64.07,26.29 R5.2
N$10
  Bottom 0.2: U$5.5 58.3,25.64 59.06,24.89 60.11,24.89 60.58,24.42 62.24,24.42 R6.2
  Bottom 0.254: 64.2,22.46 R6.2
N$11
  Bottom 0.2: U$6.7 59.69,10.38 60.24,9.82 60.24,6.7 60.56,6.38 62.86,6.38 63.16,6.68 63.16,9.37 63.25,9.46 63.25,12.78 63.89,13.42 64.39,13.42
  Bottom 0.254: R7.2 64.39,13.42
N$13
  Bottom 0.2: R8.2 63.96,18.12 63.35,17.51 63.35,14.64 62.23,13.52
  Bottom 0.254: U$6.5 62.23,13.52
N$14
  Bottom 0.254: Q2.4 80.5,24.82 80.28,24.6 64.26,24.6 R5.1
N$15
  Bottom 0.2: R7.1 64.46,10.97 65.1,10.33 71.44,10.33 72.33,11.22
  Bottom 0.254: Q4.4 72.33,11.22
N$16
  Bottom 0.2: 66.02,15.74 65.04,15.74 R8.1
  Bottom 0.254: Q3.4 70.39,16 70.13,15.74 66.02,15.74
N$17
  Bottom 0.2: U$7.4 53.67,18.32 54.47,18.32 55.21,17.58 57.07,17.58 57.87,18.38 59.41,18.38 59.69,18.11 U$6.2
N$18
  Bottom 0.2: Q1.4 66.64,20.8 66.51,20.94 64.5,20.94 R6.1
N$19
  Top 0.2: D5.1 72.05,5.31 71.11,4.37 70.63,4.37 SWD1.1
  Bottom 0.2: SWD1.1 68.96,2.7 67.76,2.7 65.68,4.78 57.42,4.78 56.68,5.52 48.25,5.52 47.94,5.83 42.18,5.83 41.33,6.68 41.33,10.91 42.26,11.84 R22.2
N$20
  Bottom 0.2: SWD1.2 71.58,5.5 R21.1
N$22  (via drill 0.6)
  Top 0.2: R19.1 55.84,22.15 55.23,21.54 50.45,21.54 50.1,21.89 50.1,22.54 49.1,23.54 43.44,23.54 v43.07,23.91
  Bottom 0.2: SWD1.4 75.1,1.22 68.39,1.22 65.39,4.22 57.25,4.22 56.43,5.04 48.01,5.04 47.67,5.38 41.94,5.38 40.88,6.44 40.88,14.89 40.61,15.16 40.61,17.37 40.2,17.78 40.2,21.04 v43.07,23.91
N$28
  Bottom 0.2: SWD1.5 79.2,5.39 R11.1
N$30
  Top 0.254: U$8.P$_4 38.54,28.76 38.97,28.33 38.97,25.46 C16.1
N$34
  Top 0.2: LED3.A 37.73,6.64 38.19,7.1 38.19,7.95 R26.1
N$37
  Top 0.2: LED4.A 39.46,6.33 40.14,7.01 40.14,7.98 R27.1
N$38
  Top 0.2: U$11.7 49.84,5.87 49.84,5 50.43,4.42 51.72,4.42 52.15,4.85 52.15,6.71 52.99,7.55 53.76,7.55 R23.1
N$42
  Top 0.2: U$11.6 48.58,5.92 48.58,4.83 48.97,4.43 49.69,4.43 50.1,4.02 51.95,4.02 52.4,4.47 52.4,4.48 52.72,4.8 52.72,6.49 53.04,6.81 55.08,6.81 R24.1
N$45  (1 unrouted)
  Top 0.2: 55.94,5.91 57.95,5.91 R25.1 | R24.2 55.91,5.79 53.3,3.18 53.3,2.06 RS485.3
N$48
  Top 0.2: R23.2 53.83,5.92 53.83,5.17 52.25,3.59 50.93,3.59 50.74,3.4 | RS485.2 50.74,3.4 | TERM.2 47.81,7.5 48.08,7.23 48.08,4.54 48.63,3.99 49.37,3.99 49.86,3.5 50.64,3.5 50.74,3.4
N$49  (via drill 0.6)
  Top 0.2: R25.2 57.98,8.38 v56.77,9.59
  Bottom 0.2: v56.77,9.59 56.2,9.59 53.04,6.43 48.75,6.43 48.32,6.86 45.17,6.86 44.64,7.39 44.64,8.4 TERM.1 43.02,10.06
N$50
  Top 0.2: 61.34,10.43 R28.1 61.18,10.59 61.18,11.18 60.3,12.06 U$12.P$6
N$51
  Top 0.2: 62.49,7.28 60.75,7.28 C25.1 | 59.72,8.31 C25.1 | R28.2 59.72,9.42 60.11,9.03 60.11,7.92 C25.1
  Top 0.254: 63.31,7.64 Q9.P1 62.49,7.28
N$52
  Top 0.2: U$12.P$5 59.8,11.98 60.56,11.22 60.56,9.78 61.56,8.78 61.56,8.77 61.91,8.42 64.04,8.42 65.53,6.93 66.78,6.93 Q9.P2
  Top 0.254: 66.64,7.07 Q9.P2 69.11,6.82 C24.1
N$53
  Top 0.2: Q10.2 56.37,13.38 56.37,12.84 56.79,12.42 56.79,11.85 57.12,11.52 58.89,11.52 59.3,11.93 U$12.P$4
  Bottom 0.2: C27.1 51.93,8.18 56.01,12.26 56.01,13.12 Q10.2
N$54
  Top 0.2: 53.66,14.59 54.37,14.59 54.56,14.4 56.93,14.4 57.31,14.02 57.31,12.11 57.43,11.99 58.67,11.99 58.8,12.12 U$12.P$3 | Q10.1 53.75,14.5 53.66,14.59 | C26.1 52.99,15.26 53.66,14.59
N$55
  Top 0.2: R34.2 57.49,31.7 57.1,32.09 57.1,33.28 56.8,33.58 54.13,33.58 51.02,30.47 51.03,30.46 U$16.P$2
N$56
  Top 0.2: R35.1 51.27,25.97 50.68,25.97 50.43,25.72 50.43,23.13 50.89,22.67 53.72,22.67 R33.2
  Top 0.254: U$16.P$3 51.68,26.38 R35.1 51.45,26.03
N$57
  Top 0.254: U$16.P$1 50.38,28.36 49.12,27.1 49.12,25.97 L1.1
N$58  (via drill 0.6)
  Top 0.2: v69.22,28.7 69.22,28.53 69.71,28.04 70.9,28.04 U$13.P$4
  Top 0.254: U$13.P$4 71.91,28.07 72.52,27.46 73.28,27.46 R29.1
  Bottom 0.2: U$17.2 49.4,23.25 48.75,23.9 48.75,26.05 48.57,26.23 47.36,26.23 46.99,26.6 45.76,26.6 45.41,26.95 45.41,28.03 44.5,28.94 44.5,30.17 44.21,30.46 44.21,32.34 44.69,32.82 54.2,32.82 54.49,33.11 54.49,33.12 54.52,33.15 62.49,33.15 64.16,31.48 64.16,28.82 64.64,28.34 68.86,28.34 v69.22,28.7
N$59  (via drill 0.6)
  Top 0.2: 70.93,31.93 R30.1 70.88,31.98 U$14.P$4 66.87,32.43 v66.6,32.7
  Bottom 0.2: U$18.2 47.13,25.88 46.92,26.09 45.5,26.09 45.05,26.54 45.05,27.69 44.04,28.7 44.04,29.8 43.77,30.07 41.04,30.07 39.95,31.16 39.95,33.19 40.35,33.59 40.35,33.6 40.62,33.87 43.35,33.87 43.95,33.27 53.98,33.27 54.33,33.62 65.68,33.62 v66.6,32.7
N$60
  Top 0.2: R37.1 60.61,28.03 60.61,29.47 61.11,29.97 62.79,29.97 63.1,30.28 63.1,31.11 62.79,31.42 62.12,31.42 61.74,31.8 U$14.P$1
N$61
  Top 0.2: 64.25,29.26 U$13.P$1 64.3,29.31 64.3,27.84 64.52,27.62 65.52,27.62 65.78,27.36 65.78,26.18 65.59,25.99 64.42,25.99 64.16,25.73 64.16,25.21 R36.1
N$66
  Top 0.254: R1.1 80.99,8.04 JP7.3
SD1
  Top 0.2: R37.2 60.55,26.23 60.55,24.88 61.51,23.92 61.87,23.92 62.29,23.5 U$12.P$27
SD_IN
  Bottom 0.2: U$5.3 59.59,21.75 59.59,20.3 60.6,19.29 | U$18.4 46.18,28.43 45.96,28.65 45.5,28.65 45.09,29.06 45.09,30.34 44.64,30.79 44.64,32.07 44.97,32.4 47.33,32.4 49.09,30.64 49.09,28.26 49.71,27.64 50.36,27.64 R10.1 50.68,27.96 56.24,27.96 57.04,27.16 57.04,24.74 58.22,23.56 60.89,23.56 61.5,22.95 61.5,20.18 60.6,19.29 | U$6.3 60.95,17.68 61.06,17.78 61.06,18.83 60.6,19.29
TIM2_CH1
  Top 0.2: U$12.P$38 54.75,20.07 54.62,20.2 49.87,20.2 48.73,21.34 48.73,21.94 48.37,22.3 44.59,22.3 44.18,21.89 44.18,17.28 U$10.P$3
  Bottom 0.254: R32.1 47.36,18.36 U$10.P$3
TIM2_CH2
  Top 0.2: U$12.P$39 54.55,19.57 54.32,19.8 49.55,19.8 48.07,21.28 45.26,21.28 U$10.P$1
  Bottom 0.254: R31.1 44.91,20.99 U$10.P$1
TIM12_CH1
  Top 0.2: U$12.P$26 62.8,23.56 62.33,24.03 62.33,24.86 R36.2
U1ENA
  Top 0.2: U$12.P$41 54.88,18.57 54.04,19.41 50.76,19.41 49.57,18.22 49.57,13.7 50.01,13.27 U$11.2 U$11.3
U1RX
  Top 0.2: U$12.P$43 54.71,17.57 53.62,18.66 51.24,18.66 50.4,17.82 50.4,14.08 51.27,13.21 U$11.1
U1TX
  Top 0.2: U$12.P$42 54.75,18.07 53.78,19.04 50.99,19.04 49.96,18.01 49.96,13.97 50.63,13.3 50.63,9.9 50.39,9.66 47.69,9.66 47.47,9.88 U$11.4
USBDM
  Top 0.2: U$12.P$32 59.8,24.04 58.91,24.93 R34.1
USBDP
  Top 0.2: U$12.P$33 59.3,23.68 58.84,24.14 57.37,24.14 56.87,24.64 54.59,24.64 R33.1
VCC  (via drill 0.6)
  Top 0.2: v75.99,28.39 75.99,28.27 76.79,27.47 76.79,26.13 77.29,25.63 79.63,25.63 80.22,26.22 | v56.98,28.45 56,27.47 53.59,27.47 53.41,27.29 53.01,27.29 v52.54,26.82
  Top 0.61: U$15.3 80.15,26.29 80.22,26.22 81.86,24.58 | 81.86,24.58 84.96,24.58 PWR1.2 | C39.1 80.95,23.67 81.86,24.58
  Bottom 0.2: C12.1 58.1,17.03 U$6.1 58.41,15.46 58.75,15.13 61.39,15.13 61.61,15.35 61.61,19.31 62.12,19.82 | D4.A 51.15,14.59 52.72,14.59 53.76,15.63 56.87,15.63 58.29,14.21 62.01,14.21 62.95,15.15 62.95,18.98 62.12,19.82 | C11.1 56.23,25.27 D1.A 53.02,26.34 v52.54,26.82 | v75.99,28.39 75.5,27.9 64.4,27.9 63.59,28.71 63.59,31.32 62.19,32.72 54.84,32.72 53.13,31.01 53.13,29.16 53.54,28.75 56.68,28.75 v56.98,28.45 57.47,27.96 57.47,24.87 58.37,23.97 61.13,23.97 62.12,22.98 U$5.1 62.12,19.82
VCC/2  (via drill 0.6)
  Top 0.2: 70.86,33.7 R30.2 | R30.2 72.6,33.53 | R30.2 74.55,33.53 75.7,32.38 75.7,29.7 76.08,29.32 77.12,29.32 U$15.1 | 65.74,33.68 65.74,32.26 66.77,31.23 66.77,30.13 66.98,29.92 67.98,29.92 | R30.2 70.75,33.25 U$14.P$5 68.25,33.34 67.18,33.34 66.84,33.68 65.74,33.68 | 65.74,33.68 65.02,34.4 53.27,34.4 52.85,33.98 46.47,33.98 45.86,33.37 45.86,31.98 v45.49,31.61
  Top 0.254: U$13.P$5 73.1,29.34 R29.2 | C35.1 73,30.77 72.34,30.11 71.27,30.11 71.03,29.87 71.03,29.44 U$13.P$5 | U$13.P$5 70.04,29.34 69.49,29.89 68.01,29.89 67.98,29.92
  Top 0.61: U$15.1 77.15,28.19 C41.1
  Bottom 0.2: C34.1 51.02,20.25 U$7.5 53.4,20.49 53.42,20.49 U$17.5 52.56,22.31 52.35,22.52 52.35,25.69 51.19,26.85 49.48,26.85 48.62,27.71 48.11,27.71 U$18.5 48.12,27.78 48.12,28.66 48.03,28.75 48.03,29.66 C40.1 48,30.87 47.41,31.46 45.82,31.46 v45.49,31.61
VDD
  Top 0.254: C8.+ 75.5,18.25 C13.1
  Bottom 0.61: Q2.8 76.69,18.48 76.65,18.44 | Q2.7 77.97,18.59 77.81,18.44 | Q2.6 79.23,18.5 79.3,18.44 79.19,18.34 Q4.7 | Q2.5 80.5,18.57 80.37,18.44 | Q4.8 80.47,18.36 80.54,18.44 | Q4.6 77.92,18.43 77.94,18.44 | Q4.5 76.66,18.3 76.8,18.44
  Bottom 1.27: C8.+ 76.15,18.44 76.65,18.44 76.8,18.44 77.81,18.44 77.94,18.44 79.3,18.44 80.37,18.44 80.54,18.44 81.78,18.44 85,21.66 PWR1.1

## Text on the board
tNames: ServoDriver v1.2 | GND | VCC | PWR | 5V | T+ | T- | R+ | R- | GND
bNames: DRV1